# Altium PCB US_AB_PCB.PcbDoc
Units mm, origin at the board's own origin, x right, y up, seen from the top; angles counter-clockwise.
Board outline 100 x 100 mm, 2 copper layers (Top Layer, Bottom Layer), stack 0.98 mm thick; 25 components, 16 nets, 96 pads, 893 vias.
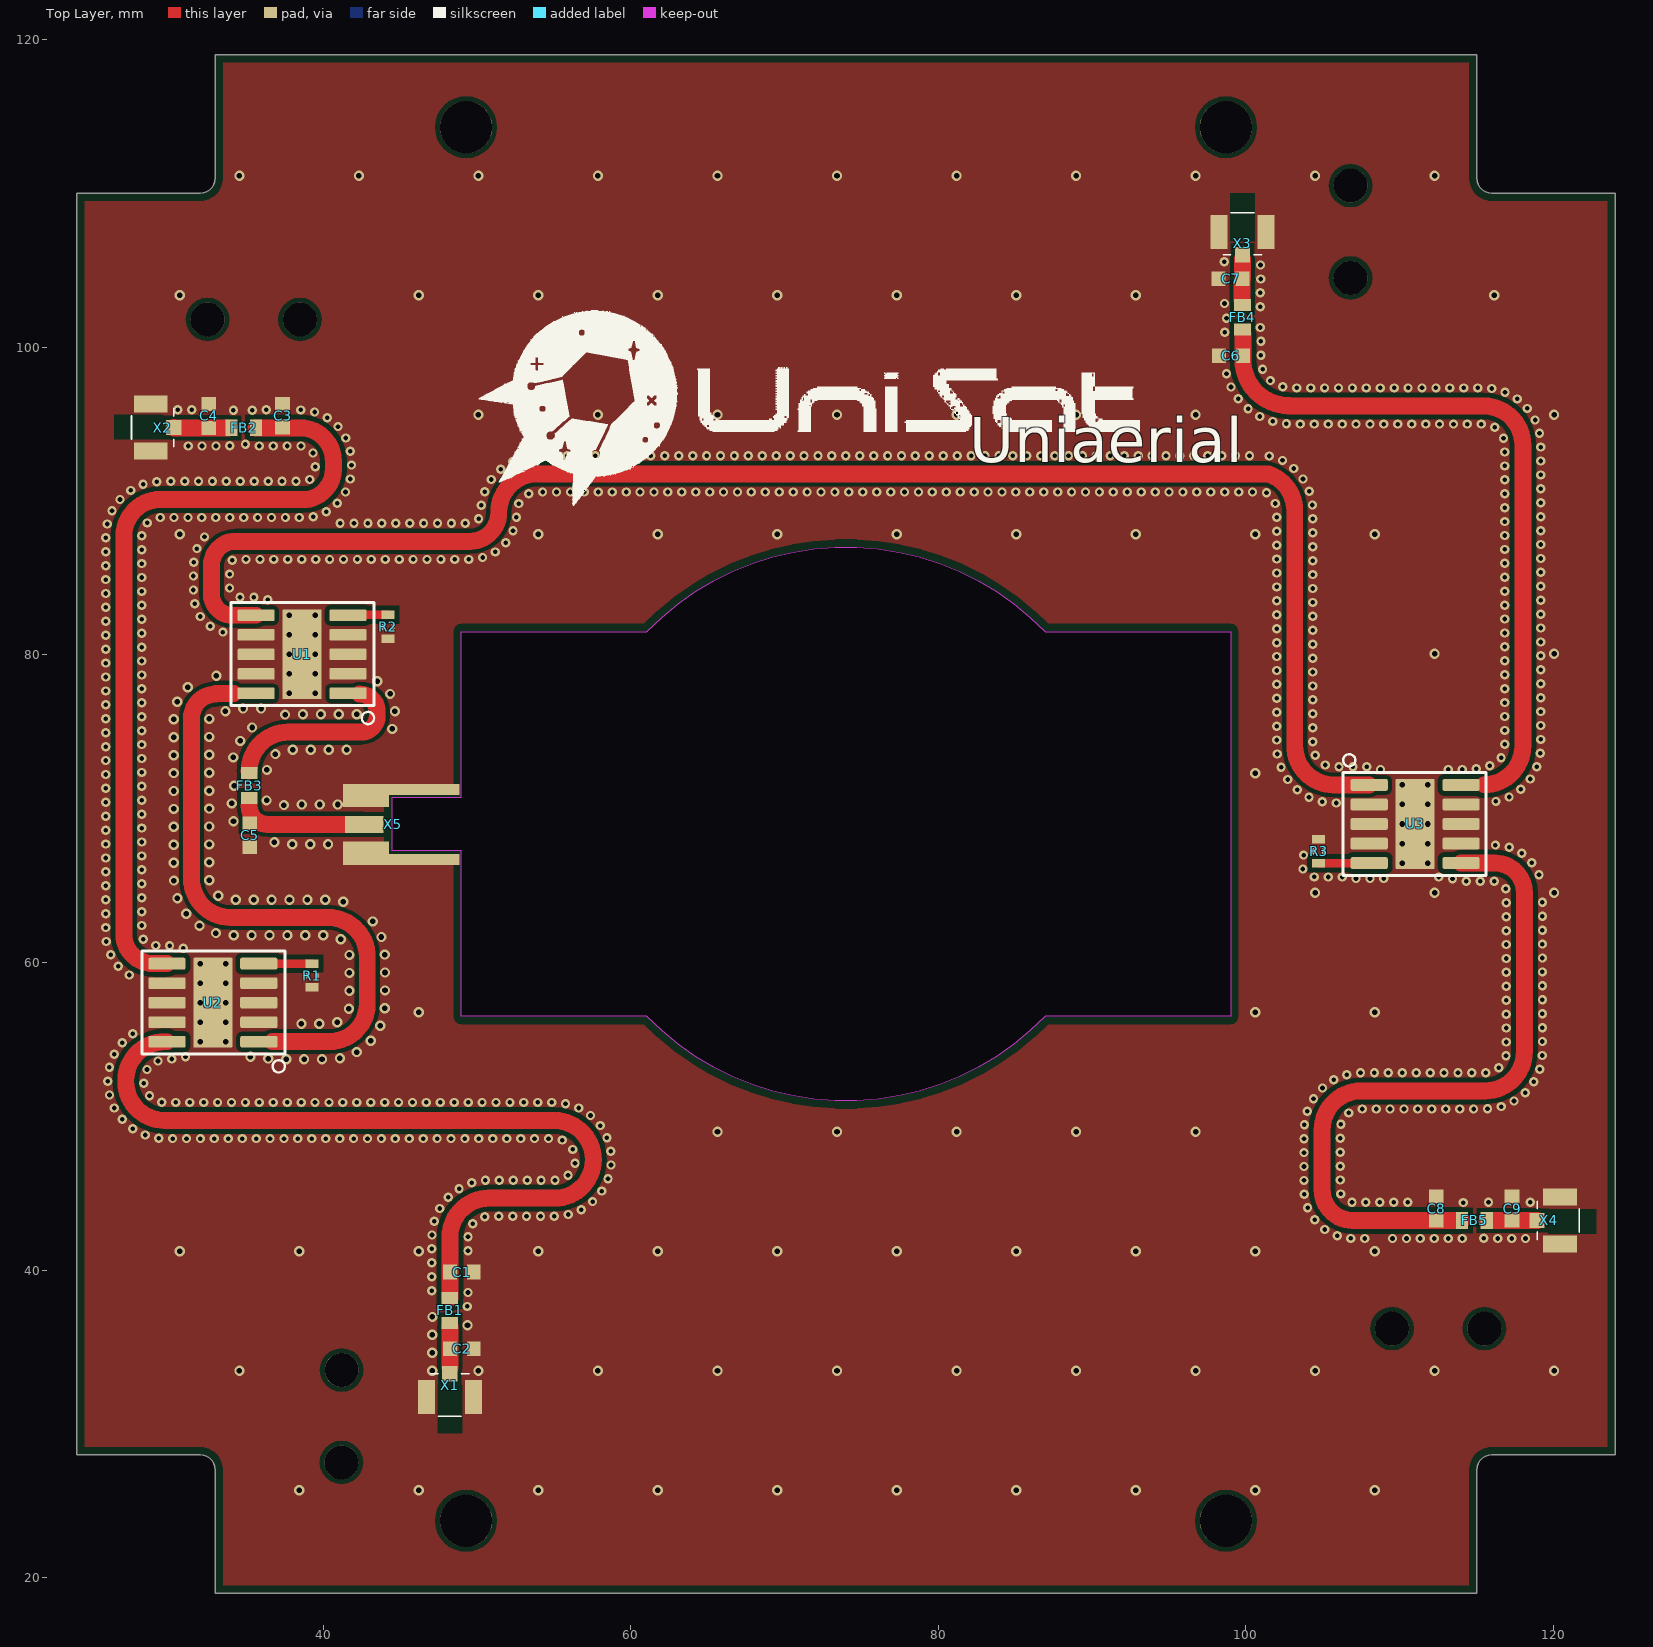
[diagram p0: Top Layer view]
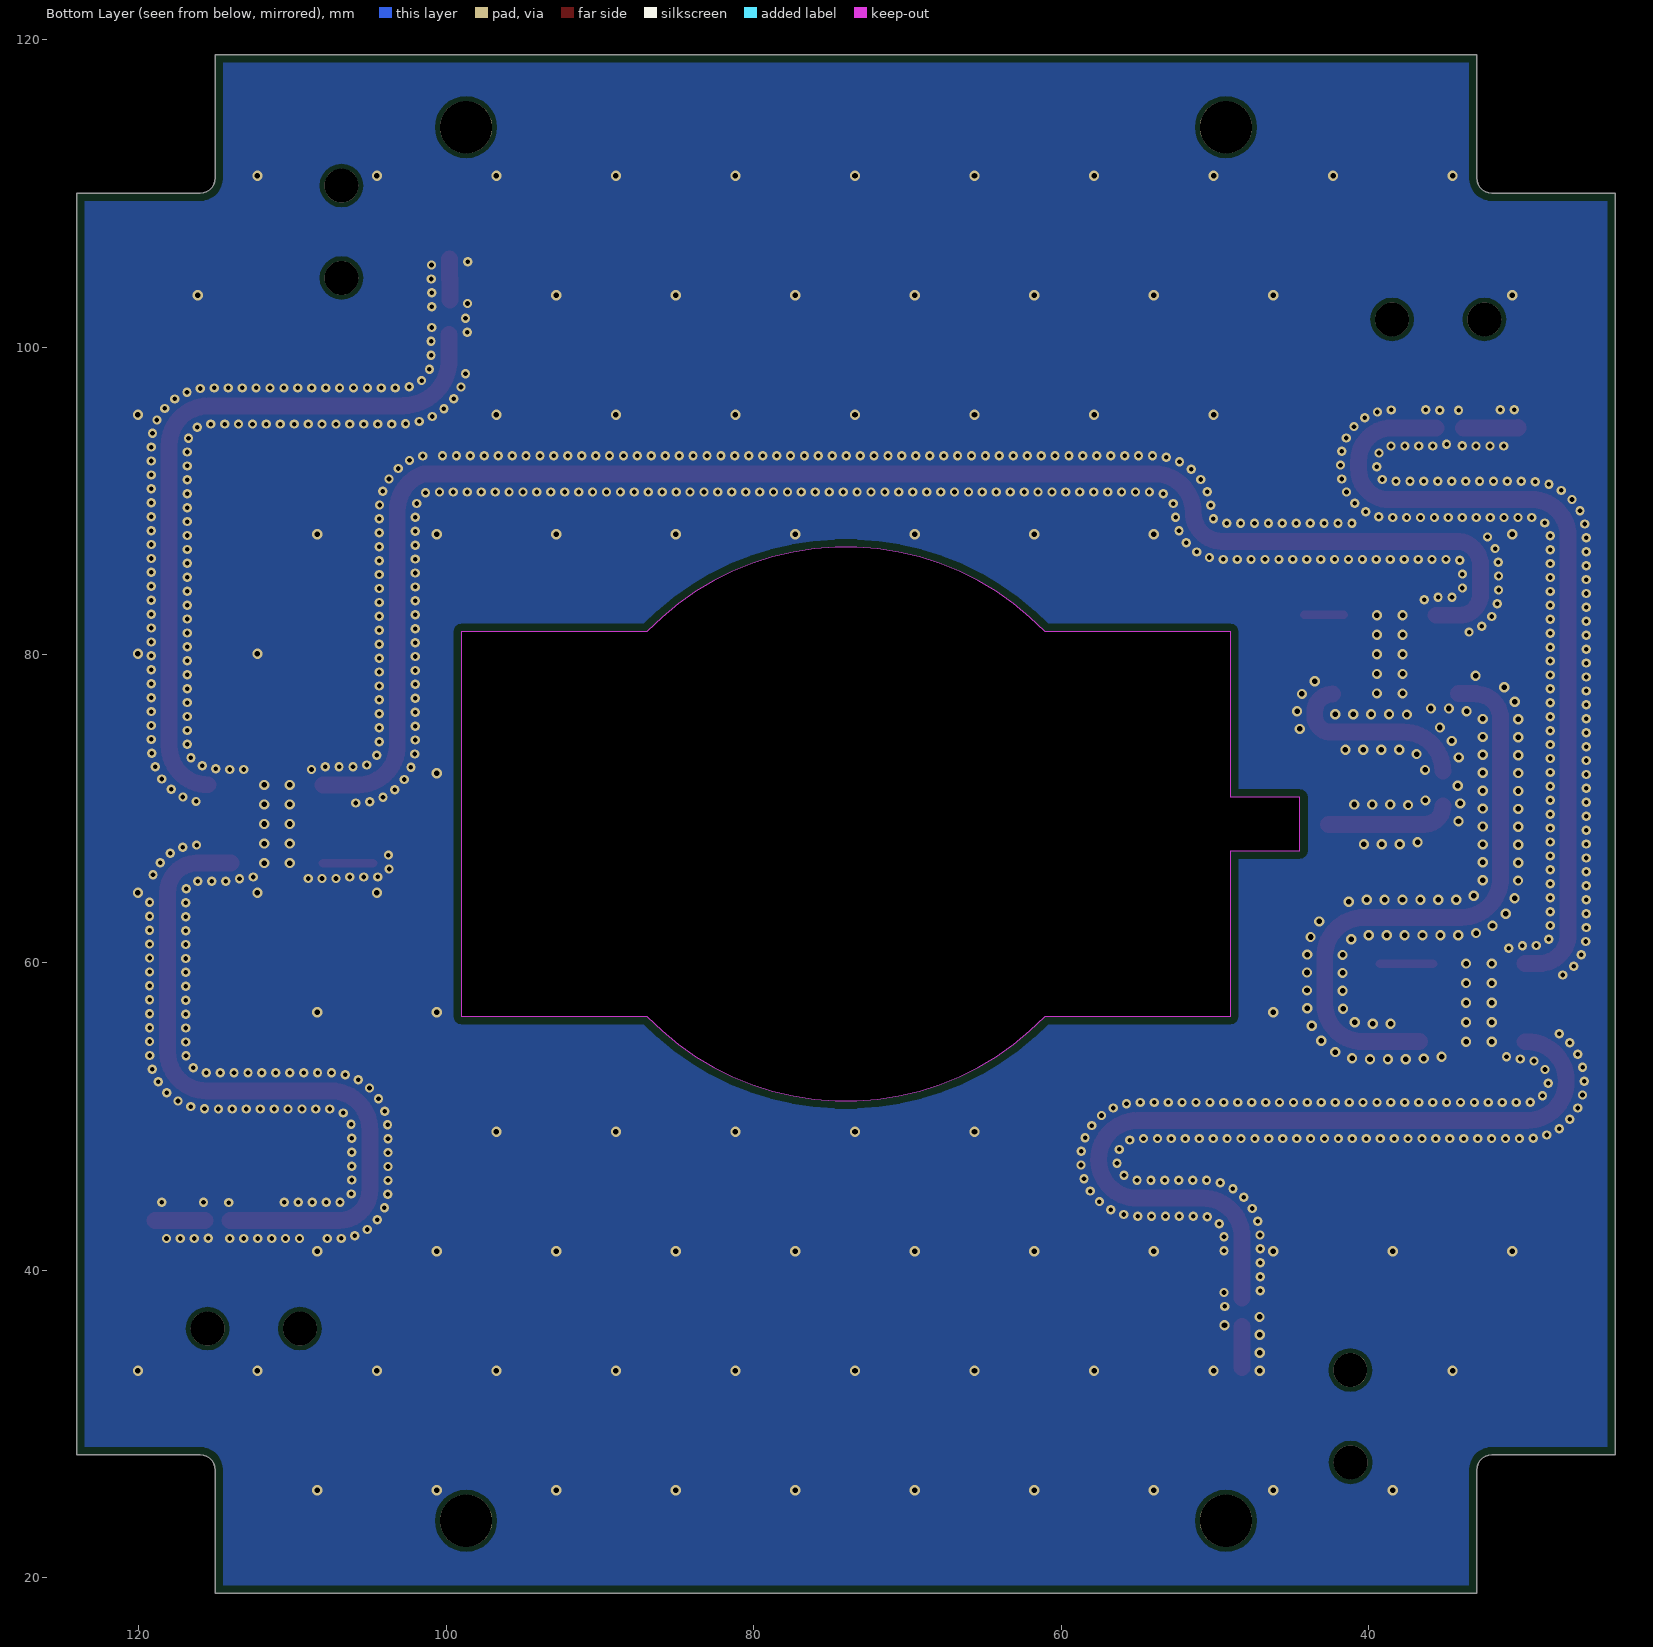
[diagram p1: Bottom Layer view, seen from below]
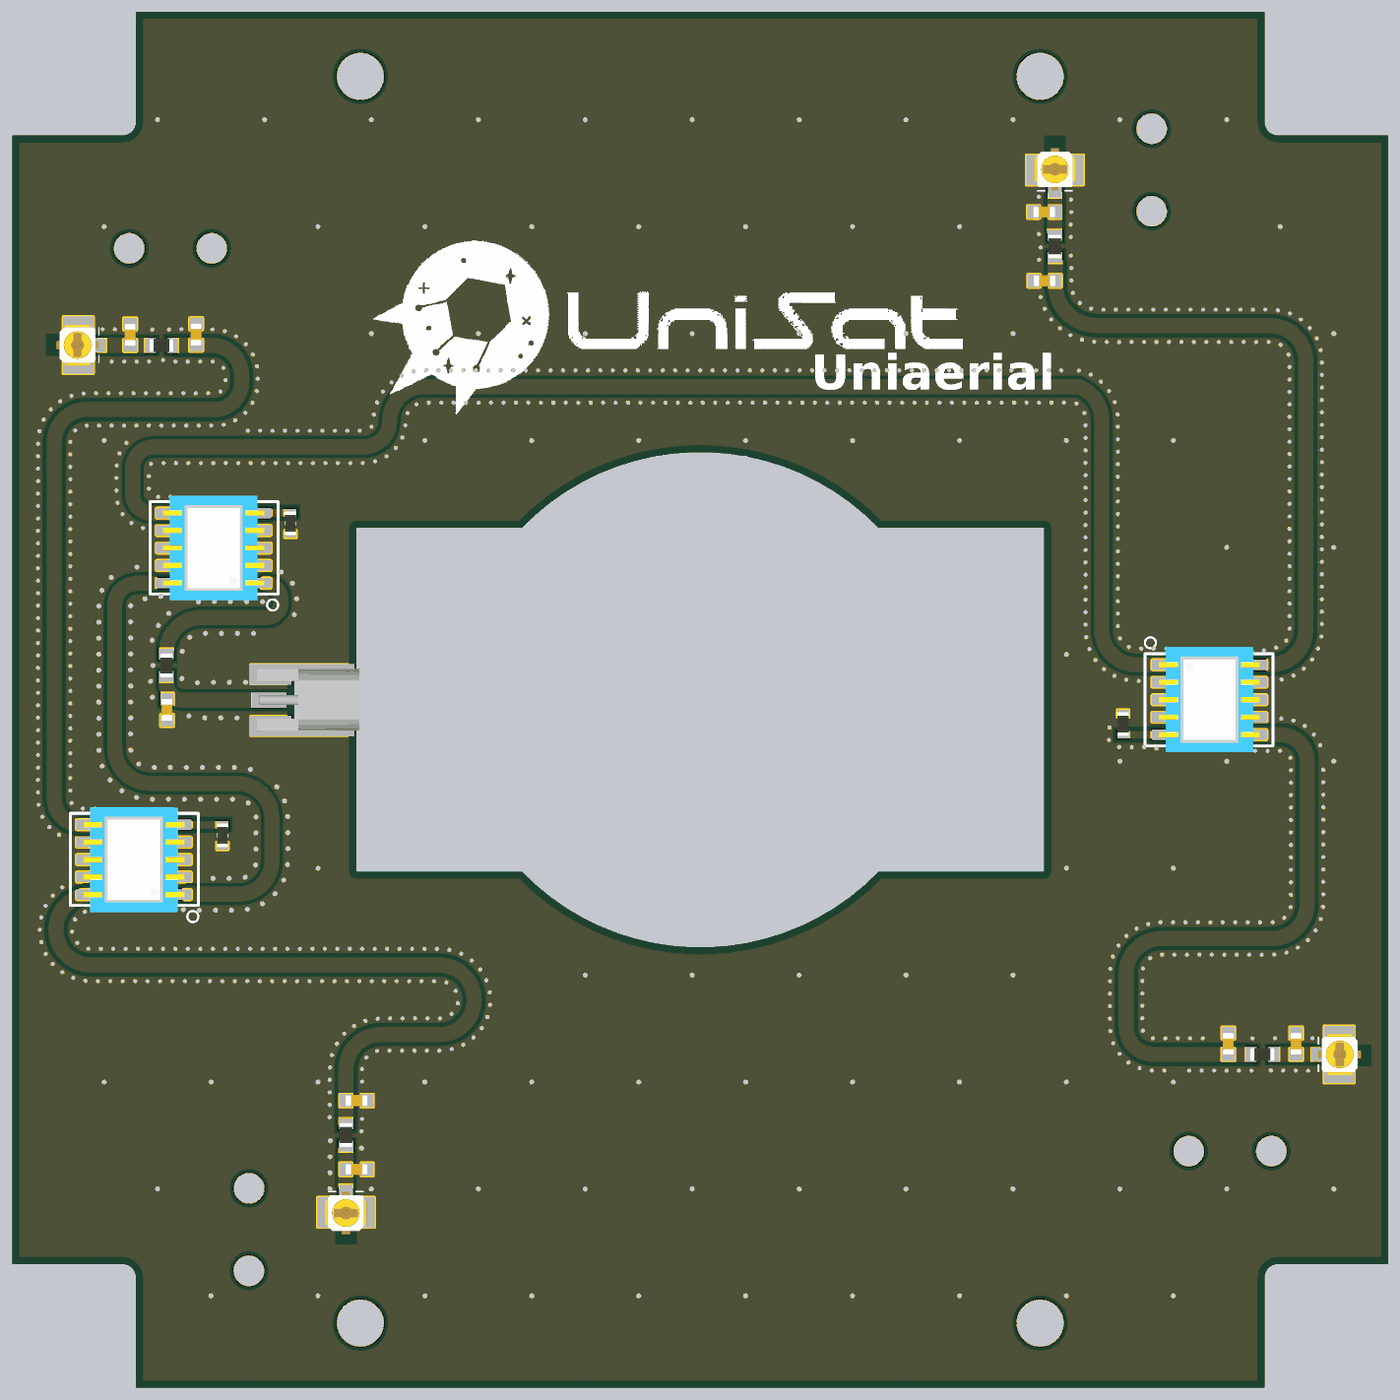
[diagram p2: 3D render of the assembled board from above, using the file's embedded part models]

## Layer stack, top to bottom
Top Solder: solder mask 0.01, Solder Resist, Dk 3.5
Top Layer: signal copper 0.035
Dielectric 1: dielectric 0.91, FR-4, Dk 4.8
Bottom Layer: signal copper 0.035
Bottom Solder: solder mask 0.01, Solder Resist, Dk 3.5

## Board outline
115,19 115,27 115.025,27.223 115.099,27.434 115.218,27.623 115.377,27.782 115.566,27.901 115.777,27.975 116,28 124,28 124,110 116,110 115.777,110.025 115.566,110.099 115.377,110.218 115.218,110.377 115.099,110.566 115.025,110.777 115,111 115,119 33,119 33,111 32.975,110.777 32.901,110.566 32.782,110.377 32.623,110.218 32.434,110.099 32.223,110.025 32,110 24,110 24,28 32,28 32.223,27.975 32.434,27.901 32.623,27.782 32.782,27.623 32.901,27.434 32.975,27.223 33,27 33,19
cut-out: 49,70.75 49,81.5 61.048,81.5 62.041,82.453 63.104,83.328 64.231,84.118 65.415,84.821 66.649,85.43 67.926,85.944 69.238,86.359 70.579,86.672 71.939,86.882 73.312,86.987 74.688,86.987 76.061,86.882 77.421,86.672 78.762,86.359 80.074,85.944 81.351,85.43 82.585,84.821 83.769,84.118 84.896,83.328 85.959,82.453 86.952,81.5 99,81.5 99,56.5 86.952,56.5 85.959,55.547 84.896,54.672 83.769,53.882 82.585,53.179 81.351,52.57 80.074,52.056 78.762,51.641 77.421,51.328 76.061,51.118 74.688,51.013 73.312,51.013 71.939,51.118 70.579,51.328 69.238,51.641 67.926,52.056 66.649,52.57 65.415,53.179 64.231,53.882 63.104,54.672 62.041,55.547 61.048,56.5 49,56.5 49,67.25 44.5,67.25 44.5,70.75

## Design rules (kind name [scope] priority, off if disabled: settings)
BoardOutlineClearance [All] p1: gap=0.5
BoardOutlineClearance BoardOutlineClearance_ALL [IsRegion and InNet('GND')] p2: gap=0.5
Clearance Clearance_RF [InNetClass('RF') vs InNet('GND')] p1: gap=0.25
Clearance Clearance_HOLE [IsRegion and OnMultiLayer] p2: gap=0.1
Clearance Clearance_ALL [All] p3: gap=0.3
ComponentClearance ComponentClearance_HOLE [IsBoardCutoutRegion] p1: gap=-1 collisioncheckmode=3 verticalgap=-1 showdistances=FALSE
ComponentClearance ComponentClearance_ALL [All] p2: gap=0.254 collisioncheckmode=3 verticalgap=0.254 showdistances=FALSE
HoleSize [All] p1: absolutevalues=TRUE maxlimit=6.2 minlimit=0.3 maxpercent=80.000 minpercent=20.000
MatchedLengths MatchedLengths_2 [InNetClass('RF_2')] p1: tolerance=1 checknetsindiffpair=FALSE checkdiffpairvsdiffpair=TRUE checkxsignals=TRUE checkothers=TRUE
MatchedLengths MatchedLengths_1 [InNetClass('RF_1')] p2: tolerance=1 checknetsindiffpair=FALSE checkdiffpairvsdiffpair=TRUE checkxsignals=TRUE checkothers=TRUE
MinimumAnnularRing [All] p1: minimumring=0.152
PolygonConnect PolygonConnect_GNDPAD [InNet('GND')] p1: connectstyle=Direct reliefconductorwidth=0.254 reliefentries=4 polygonreliefangle="90 Angle" airgapwidth=0.254
PolygonConnect PolygonConnect_ALL [All] p2: connectstyle=Relief reliefconductorwidth=0.254 reliefentries=4 polygonreliefangle="90 Angle" airgapwidth=0.254
RoutingVias [All] p1: holewidth=0.3 width=0.605 viastyle="Through Hole" minholewidth=0.2 minwidth=0.51 maxholewidth=1 maxwidth=2
SilkToSilkClearance [All] p1: silktosilkclearance=-1
SilkToSolderMaskClearance [All] p1: minsilkscreentomaskgap=-1 clearancetoexposedcopper=TRUE
SolderMaskExpansion [All] p1: expansion=0.102
Width Width_RF [InNetClass('RF')] p1: maxlimit=1.1 minlimit=1.1 preferedwidth=1.1
Width Width_ALL [All] p2: maxlimit=10 minlimit=0.157 preferedwidth=0.3
26 further rules are at their usual default settings.

## Classes and differential pairs
net class RF: NetC2_2 NetC4_2 NetC5_2 NetC7_2 NetC9_2 NetFB3_2 NetU1_6 NetU1_10
net class RF_1: NetC1_2 NetC3_2
net class RF_2: NetC6_2 NetC8_2

## Components (designator, comment, footprint, x,y, rotation, side; value= is the part's Value field where it differs from the comment)
C1 "100n" C0603_IPC_MD 49.025,39.875 r180 top
C2 "100n" C0603_IPC_MD 49.025,34.875 r180 top
C3 "100n" C0603_IPC_MD 37.367,95.544 r270 top
C4 "100n" C0603_IPC_MD 32.575,95.525 r270 top
C5 "100n" C0603_IPC_MD 35.25,68.275 r90 top
C6 "100n" C0603_IPC_MD 99.025,99.445 r0 top
C7 "100n" C0603_IPC_MD 99,104.445 r0 top
C8 "100n" C0603_IPC_MD 112.375,44 r270 top
C9 "100n" C0603_IPC_MD 117.3,44 r270 top
FB1 "MH1608-601Y" L0603_IPC_LD 48.25,37.375 r270 top
FB2 "MH1608-601Y" L0603_IPC_LD 34.85,94.75 r180 top
FB3 "MH1608-601Y" L0603_IPC_LD 35.2,71.5 r90 top
FB4 "MH1608-601Y" L0603_IPC_LD 99.775,101.945 r90 top
FB5 "MH1608-601Y" L0603_IPC_LD 114.85,43.225 r0 top
R1 "50R" R0603_IPC_MD 39.275,59.15 r90 top
R2 "50R" R0603_IPC_MD 44.225,81.825 r90 top
R3 "50R" R0603_IPC_MD 104.725,67.225 r270 top
U1 "QBA-07+" QBA-07+ 38.64,80.03 r90 top
U2 "QBA-07+" QBA-07+ 32.84,57.385 r90 top
U3 "QBA-07+" QBA-07+ 111,69 r270 top
X1 "U.FL" U.FL 48.25,31.75 r180 top
X2 "U.FL" U.FL 28.8,94.775 r90 top
X3 "U.FL" U.FL 99.775,107.495 r0 top
X4 "U.FL" U.FL 120.425,43.225 r270 top
X5 "MMCX" MMCX_EDGE 49.125,68.975 r180 top locked

## Footprints (in the part's own frame and the unit in brackets; to place one, negate y for a bottom-side part, rotate by r counter-clockwise, add the part's x,y. Pads: shape width x height; smd on the part's side, far side on the other; paste and mask are expansions set on the pad)
C0603_IPC_MD [mm] "Chip Capacitor, 2-Leads, Body 1,60x0,80mm, IPC Medium Density"
  rect 0.9x0.95 smd: 1(-0.775,0) 2(0.775,0)
  body extent -0.8,-0.4 0.8,0.4, height 0.8
L0603_IPC_LD [mm]
  rect 0.79x1.08 smd: 1(-0.805,0) 2(0.805,0)
  body extent -0.87,-0.48 0.87,0.48, height 0.8
MMCX_EDGE [mm]
  rect 5x0.7 smd mask+0.051: 1(2.75,2.275) 1(2.75,-2.275)
  rect 3x1.5 smd mask+0.051: 1(6.325,-1.875) 1(6.325,1.875)
  rect 2.5x1.1 smd mask+0.051: 2(6.45,0)
  body extent -0.09,-2.27 7.35,2.23, height 2.1
QBA-07+ [mm]
  rrect25% 0.76x2.41 smd: 1(-2.54,-2.985) 2(-1.27,-2.985) 3(0,-2.985) 4(1.27,-2.985) 5(2.54,-2.985) 6(2.54,2.985) 7(1.27,2.985) 8(0,2.985) 9(-1.27,2.985) 10(-2.54,2.985)
  rrect5% 5.84x2.54 smd: 11(0,0)
  silkscreen extent -4.54,-4.69 3.36,4.61, body extent -3.81,-3.67 3.81,3.67, height 1.1
R0603_IPC_MD [mm] "Chip Resistor, 2-Leads, Body 1,60x0,80mm, IPC Medium Density"
  rect 0.55x0.85 smd: 1(-0.775,0) 2(0.775,0)
  silkscreen extent -0.1,-0.33 0.1,0.33, body extent -0.85,-0.4 0.85,0.4, height 0.45
U.FL [mm] "RF CONNECTOR"
  rect 1.1x2.2 smd: 1(-1.525,0) 1(1.525,0)
  rect 1x1 smd: 2(0,-1.5)
  silkscreen extent -1.25,-1.5 1.25,1.25, body extent -1.5,-1.5 1.5,1.6, height 1.25

## Part data
C1 C2 C3 C4 C5 C6 C7 C8 C9: library part CL10B104KO8NNNC
FB1 FB2 FB3 FB4 FB5: "FERRITE BEAD 600R@100MHz 0603 for Power Line, 1000mA"
R1 R2 R3: library part CR0603-J/-000ELF, "RES SMD 0 OHM JUMPER 1/10W 0603"
U1 U2 U3: "Power Splitter/Combiner 2 Way-90° 50? 340 to 680 MHz"
X1 X2 X3 X4: "SMA slot"
X5: "MMCX PCB EDGE CONN"

## Free pads (board coordinates)
  round 2.2 hole 2.2: 1(32.5,101.8) 1(38.5,101.8) 1(41.2,27.5) 1(41.214,33.5) 1(106.8,104.5) 1(106.8,110.5) 1(109.5,36.2) 1(115.5,36.2)
  round 3.4 hole 3.4: 1(49.3,23.7) 1(49.3,114.3) 1(98.7,23.7) 1(98.7,114.3)

## Via types
v1: diameter 0.605, hole 0.3, Top Layer to Bottom Layer, tented both sides, 678 vias
v2: diameter 0.665, hole 0.36, Top Layer to Bottom Layer, tented both sides, 185 vias
v3: diameter 0.665, hole 0.36, Top Layer to Bottom Layer, 30 vias

## Nets (pads, with @x,y where several pads share a name; then routed paths per layer and width w, separated by ;. In a path a pad name is that pad's centre, name@x,y a point inside that pad or via, vN(x,y) a via of type N, cw(c..) or ccw(c..) an arc to the next point about the centre after c; other vN are vias at no path point)
GND: C1.1 C2.1 C3.1 C4.1 C5.1 C6.1 C7.1 C8.1 C9.1 R1.1 R2.1 R3.1 U1.2 U1.3 U1.4 U1.7 U1.8 U1.9 U1.11 U2.2 U2.3 U2.4 U2.7 U2.8 U2.9 U2.11 U3.2 U3.3 U3.4 U3.7 U3.8 U3.9 U3.11 X1.1 X2.1 X3.1 X4.1 X5.1
  other v1: 49.375,37.637 49.425,38.54 47.075,38.663 47.075,39.568 47.075,40.473 49.425,41.255 47.075,41.378 106.816,42.059 107.721,42.05 109.531,42.05 110.436,42.05 111.341,42.05 112.246,42.05 113.151,42.05 114.056,42.052 116.367,42.05 117.272,42.05 118.177,42.05 115.463,42.071 49.423,42.16 105.927,42.229 47.086,42.283 105.118,42.635 49.742,43.007 47.23,43.176 104.467,43.264 50.516,43.476 51.421,43.5 52.326,43.5 53.231,43.5 54.136,43.5 55.041,43.5 55.938,43.616 56.787,43.931 47.592,44.006 104.007,44.043 114.133,44.388 106.894,44.402 107.799,44.4 108.704,44.4 109.609,44.4 110.514,44.4 115.768,44.4 118.483,44.4 57.525,44.454 48.136,44.729 103.8,44.924 106.173,44.95 58.119,45.137 48.847,45.289 49.667,45.67 50.558,45.832 103.775,45.829 51.463,45.85 52.368,45.85 53.273,45.85 54.178,45.85 55.083,45.847 106.125,45.854 58.528,45.944 55.928,46.169 103.775,46.734 106.125,46.759 58.723,46.828 56.382,46.953 103.775,47.639 106.125,47.664 58.705,47.733 56.228,47.844 55.557,48.451 30.222,48.55 31.127,48.55 32.032,48.55 32.937,48.55 33.842,48.55 34.747,48.55 35.652,48.55 36.557,48.55 37.462,48.55 38.367,48.55 39.272,48.55 40.177,48.55 41.082,48.55 41.987,48.55 42.892,48.55 43.797,48.55 44.702,48.55 45.607,48.55 46.512,48.55 47.417,48.55 48.322,48.55 49.227,48.55 50.132,48.55 51.037,48.55 51.942,48.55 52.847,48.55 53.752,48.55 54.657,48.55 103.775,48.544 29.317,48.581 106.125,48.569 58.457,48.603 28.436,48.785 27.63,49.198 58.016,49.394 103.801,49.449 106.176,49.473 26.952,49.797 57.389,50.046 106.69,50.217 103.988,50.334 107.558,50.475 108.463,50.475 109.368,50.475 110.273,50.475 111.178,50.475 112.083,50.475 112.988,50.475 113.893,50.475 114.798,50.475 115.703,50.485 26.43,50.536 56.627,50.535 116.596,50.629 55.768,50.819 29.527,50.914 30.432,50.9 31.337,50.9 32.242,50.9 33.147,50.9 34.052,50.9 34.957,50.9 35.862,50.9 36.767,50.9 37.672,50.9 38.577,50.9 39.482,50.9 40.387,50.9 41.292,50.9 42.197,50.9 43.102,50.9 44.007,50.9 44.912,50.9 45.817,50.9 46.722,50.9 47.627,50.9 48.532,50.9 49.437,50.9 50.342,50.9 51.247,50.9 52.152,50.9 53.057,50.9 53.962,50.9 54.867,50.9 117.427,50.989 104.392,51.144 28.722,51.327 26.117,51.385 118.151,51.532 104.976,51.835 28.356,52.155 118.711,52.243 26,52.283 105.71,52.364 106.553,52.695 107.449,52.821 108.354,52.825 109.259,52.825 110.164,52.825 111.069,52.825 111.974,52.825 112.879,52.825 113.784,52.825 114.689,52.825 115.594,52.824 28.561,53.037 119.093,53.063 116.439,53.148 26.116,53.18 29.273,53.595 30.169,53.72 31.063,53.862 116.903,53.925 119.257,53.953 26.428,54.029 26.949,54.77 116.925,54.829 119.275,54.858 27.626,55.37 116.925,55.734 119.275,55.763 116.925,56.639 119.275,56.668 116.925,57.544 119.275,57.573 116.925,58.449 119.275,58.478 27.405,59.184 116.925,59.354 119.275,59.383 26.699,59.75 116.925,60.259 119.275,60.288 26.192,60.499 30.919,60.927 30.027,61.078 29.122,61.1 116.925,61.164 119.275,61.193 25.918,61.362 28.309,61.498 116.925,62.069 119.275,62.098 25.875,62.266 28.225,62.399 116.925,62.974 119.275,63.003 25.875,63.171 28.225,63.304 116.925,63.879 119.275,63.908 25.875,64.076 28.225,64.209 116.887,64.784 25.875,64.981 28.225,65.114 114.323,65.285 115.228,65.285 116.133,65.285 113.43,65.431 107.158,65.458 108.063,65.458 108.968,65.458 104.449,65.561 105.354,65.555 106.259,65.555 112.534,65.557 119.051,65.695 25.875,65.886 28.225,66.019 103.705,66.077 118.589,66.473 25.875,66.791 28.225,66.924 103.746,66.981 117.929,67.093 117.113,67.483 116.22,67.63 25.875,67.696 28.225,67.829 25.875,68.601 28.225,68.734 25.875,69.506 28.225,69.639 105.862,70.365 25.875,70.411 104.961,70.451 116.251,70.467 28.225,70.544 104.103,70.738 117.108,70.758 103.345,71.233 117.86,71.26 25.875,71.316 28.225,71.449 102.723,71.89 118.477,71.923 25.875,72.221 28.225,72.354 108.748,72.542 113.156,72.542 114.061,72.542 114.965,72.598 102.285,72.682 106.049,72.715 106.954,72.715 107.859,72.715 118.907,72.719 115.851,72.78 105.152,72.835 25.875,73.126 28.225,73.259 116.588,73.306 104.5,73.462 102.041,73.554 119.138,73.594 25.875,74.031 28.225,74.164 116.825,74.179 104.35,74.355 102,74.458 119.175,74.498 25.875,74.936 28.225,75.069 116.825,75.084 104.35,75.26 102,75.363 119.175,75.403 25.875,75.841 28.225,75.974 116.825,75.989 104.35,76.165 102,76.268 119.175,76.308 25.875,76.746 28.225,76.879 116.825,76.894 104.35,77.07 102,77.173 119.175,77.213 25.875,77.651 28.225,77.784 116.825,77.799 104.35,77.975 102,78.078 119.175,78.118 25.875,78.556 28.225,78.689 116.825,78.704 104.35,78.88 102,78.983 119.175,79.023 25.875,79.461 28.225,79.594 116.825,79.609 104.35,79.785 102,79.888 119.175,79.928 25.875,80.366 28.225,80.499 116.825,80.514 104.35,80.69 102,80.793 119.175,80.833 25.875,81.271 28.225,81.404 116.825,81.419 33.495,81.477 104.35,81.595 102,81.698 119.175,81.738 32.67,81.849 25.875,82.176 28.225,82.309 116.825,82.324 32.029,82.489 104.35,82.5 102,82.603 119.175,82.643 25.875,83.081 28.225,83.214 116.825,83.229 31.658,83.314 104.35,83.405 102,83.508 119.175,83.548 36.398,83.572 34.605,83.745 35.51,83.745 25.875,83.986 28.225,84.119 116.825,84.134 31.575,84.215 104.35,84.31 33.925,84.343 102,84.413 119.175,84.453 25.875,84.891 28.225,85.024 116.825,85.039 31.575,85.12 104.35,85.215 33.925,85.248 102,85.318 119.175,85.358 25.875,85.796 28.225,85.929 116.825,85.944 31.592,86.025 104.35,86.12 34.094,86.137 34.996,86.2 35.901,86.2 36.806,86.2 37.711,86.2 38.616,86.2 39.521,86.2 40.426,86.2 41.331,86.2 42.236,86.2 43.141,86.2 44.046,86.2 44.951,86.2 45.856,86.2 46.761,86.2 47.666,86.2 48.571,86.2 49.476,86.2 102,86.223 119.175,86.263 50.373,86.324 25.875,86.701 51.201,86.689 28.225,86.834 116.825,86.849 31.804,86.905 104.35,87.025 102,87.128 119.175,87.168 51.875,87.292 25.875,87.606 32.297,87.663 28.224,87.739 116.825,87.754 104.35,87.93 102,88.033 52.353,88.061 119.175,88.073 25.976,88.505 41.109,88.55 42.014,88.55 42.919,88.55 43.824,88.55 44.729,88.55 45.634,88.55 46.539,88.55 47.444,88.55 48.349,88.55 49.254,88.55 28.578,88.572 116.825,88.659 50.113,88.837 104.35,88.835 29.411,88.926 30.316,88.925 31.221,88.925 32.126,88.925 33.031,88.925 33.936,88.925 34.841,88.925 35.746,88.925 36.651,88.925 37.556,88.925 38.461,88.925 52.573,88.939 102,88.938 39.364,88.98 119.175,88.978 40.208,89.308 26.284,89.356 116.825,89.564 50.287,89.725 104.321,89.739 52.733,89.829 40.932,89.851 101.914,89.839 119.175,89.883 26.804,90.097 53.378,90.465 116.825,90.469 101.333,90.532 41.465,90.582 54.275,90.586 55.18,90.586 56.085,90.586 56.99,90.586 57.895,90.586 58.8,90.586 59.705,90.586 60.61,90.586 61.515,90.586 62.42,90.586 63.325,90.586 64.23,90.586 65.135,90.586 66.04,90.586 66.945,90.586 67.85,90.586 68.755,90.586 69.66,90.586 70.565,90.586 71.47,90.586 72.375,90.586 73.28,90.586 74.185,90.586 75.09,90.586 75.995,90.586 76.9,90.586 77.805,90.586 78.71,90.586 79.615,90.586 80.52,90.586 81.425,90.586 82.33,90.586 83.235,90.586 84.14,90.586 85.045,90.586 85.95,90.586 86.855,90.586 87.76,90.586 88.665,90.586 89.57,90.586 90.475,90.586 91.38,90.586 92.285,90.586 93.19,90.586 94.095,90.586 95,90.586 95.905,90.586 96.81,90.586 97.715,90.586 98.62,90.586 99.525,90.586 100.43,90.586 50.517,90.6 104.122,90.622 27.492,90.685 119.175,90.788 28.304,91.084 29.193,91.256 30.097,91.275 31.002,91.275 31.907,91.275 32.812,91.275 33.717,91.275 34.622,91.275 35.527,91.275 36.432,91.275 37.337,91.275 38.242,91.275 116.825,91.374 39.139,91.395 50.947,91.396 41.779,91.431 103.712,91.429 119.175,91.693 51.564,92.058 103.117,92.111 39.5,92.225 116.825,92.279 41.85,92.333 52.318,92.558 119.175,92.598 102.379,92.636 53.176,92.848 101.522,92.925 54.077,92.936 54.982,92.936 55.887,92.936 56.792,92.936 57.697,92.936 58.602,92.936 59.507,92.936 60.412,92.936 61.317,92.936 62.222,92.936 63.127,92.936 64.032,92.936 64.937,92.936 65.842,92.936 66.747,92.936 67.652,92.936 68.557,92.936 69.462,92.936 70.367,92.936 71.272,92.936 72.177,92.936 73.082,92.936 73.987,92.936 74.892,92.936 75.797,92.936 76.702,92.936 77.607,92.936 78.512,92.936 79.417,92.936 80.322,92.936 81.227,92.936 82.132,92.936 83.037,92.936 83.942,92.936 84.847,92.936 85.752,92.936 86.657,92.936 87.562,92.936 88.467,92.936 89.372,92.936 90.277,92.936 91.182,92.936 92.087,92.936 92.992,92.936 93.897,92.936 94.802,92.936 95.707,92.936 96.612,92.936 97.517,92.936 98.422,92.936 99.327,92.936 100.232,92.936 39.351,93.118 116.825,93.184 41.781,93.235 119.175,93.503 31.232,93.575 32.137,93.575 33.042,93.575 33.947,93.587 35.854,93.575 36.759,93.575 37.664,93.575 38.569,93.573 34.956,93.688 41.488,94.092 116.747,94.086 119.085,94.404 116.183,94.794 40.974,94.836 102.632,95.017 103.537,95 104.442,95 105.347,95 106.252,95 107.157,95 108.062,95 108.967,95 109.872,95 110.777,95 111.682,95 112.587,95 113.492,95 114.397,95 115.302,95 101.741,95.172 118.796,95.261 40.277,95.414 100.893,95.49 39.452,95.786 34.177,95.904 35.397,95.904 30.557,95.925 31.462,95.925 36.302,95.925 38.557,95.919 100.139,95.99 118.297,96.017 99.506,96.637 117.637,96.635 116.844,97.071 115.971,97.311 103.302,97.35 104.207,97.35 105.112,97.35 106.017,97.35 106.922,97.35 107.827,97.35 108.732,97.35 109.637,97.35 110.542,97.35 111.447,97.35 112.352,97.35 113.257,97.35 114.162,97.35 115.067,97.35 99.031,97.407 102.399,97.416 101.593,97.826 98.739,98.264 101.081,98.573 100.975,99.472 100.975,100.377 98.621,100.972 100.929,101.281 98.734,101.87 100.929,102.624 98.605,102.839 100.925,103.529 100.969,104.433 100.95,105.338 98.6,105.553
  other v2: 38.45,25.68 46.22,25.68 53.99,25.68 61.76,25.68 69.53,25.68 77.3,25.68 85.07,25.68 92.84,25.68 100.61,25.68 108.38,25.68 34.565,33.45 47.095,33.462 50.105,33.45 57.875,33.45 65.645,33.45 73.415,33.45 81.185,33.45 88.955,33.45 96.725,33.45 104.495,33.45 112.265,33.45 120.035,33.45 47.095,34.627 47.095,35.792 49.393,36.411 47.116,36.957 30.68,41.22 38.45,41.22 46.22,41.22 53.99,41.22 61.76,41.22 69.53,41.22 77.3,41.22 85.07,41.22 92.84,41.22 100.61,41.22 108.38,41.22 65.645,48.99 73.415,48.99 81.185,48.99 88.955,48.99 96.725,48.99 37.605,53.705 38.77,53.705 39.935,53.705 36.441,53.747 41.098,53.773 35.281,53.863 42.192,54.173 43.101,54.903 43.728,55.884 38.597,56.015 39.762,56.015 40.923,56.107 46.22,56.76 100.61,56.76 108.38,56.76 41.682,56.991 44.008,57.015 41.72,58.155 44.03,58.18 41.72,59.32 44.03,59.345 41.715,60.485 44.02,60.51 41.151,61.505 43.797,61.653 34.192,61.77 35.357,61.77 36.522,61.77 37.687,61.77 38.852,61.77 40.017,61.77 33.035,61.906 31.972,62.381 43.228,62.67 31.11,63.165 41.309,63.94 34.328,64.08 35.493,64.08 36.658,64.08 37.823,64.08 38.988,64.08 40.153,64.08 30.535,64.179 33.19,64.332 104.495,64.53 112.265,64.53 120.035,64.53 30.306,65.321 32.612,65.343 30.295,66.486 32.605,66.508 30.295,67.651 32.605,67.673 38.001,67.681 39.166,67.681 40.331,67.681 36.844,67.82 30.295,68.816 32.605,68.838 34.181,69.178 30.295,69.981 32.605,70.003 37.459,70.231 38.623,70.269 39.788,70.269 40.953,70.269 34.066,70.337 36.334,70.533 30.295,71.146 32.605,71.168 34.227,71.491 30.295,72.311 100.61,72.3 32.605,72.333 36.358,72.516 34.166,73.327 30.295,73.476 32.605,73.498 36.909,73.543 38.04,73.82 39.205,73.82 40.37,73.82 41.535,73.82 34.623,74.398 30.295,74.641 32.605,74.663 44.501,75.184 35.391,75.274 30.295,75.806 32.605,75.828 37.533,76.114 38.698,76.13 39.863,76.13 41.028,76.13 42.193,76.13 33.653,76.335 44.673,76.336 34.805,76.508 35.97,76.508 30.521,76.949 44.357,77.457 31.201,77.895 43.534,78.282 33.069,78.645 112.265,80.07 120.035,80.07 30.68,87.84 53.99,87.84 61.76,87.84 69.53,87.84 77.3,87.84 85.07,87.84 92.84,87.84 100.61,87.84 108.38,87.84 50.105,95.61 57.875,95.61 65.645,95.61 73.415,95.61 81.185,95.61 88.955,95.61 96.725,95.61 120.035,95.61 30.68,103.38 46.22,103.38 53.99,103.38 61.76,103.38 69.53,103.38 77.3,103.38 85.07,103.38 92.84,103.38 116.15,103.38 34.565,111.15 42.335,111.15 50.105,111.15 57.875,111.15 65.645,111.15 73.415,111.15 81.185,111.15 88.955,111.15 96.725,111.15 104.495,111.15 112.265,111.15
  other v3: 32.015,54.845 33.685,54.845 32.015,56.115 33.685,56.115 32.015,57.385 33.685,57.385 32.015,58.655 33.685,58.655 32.015,59.925 33.685,59.925 110.155,66.46 111.825,66.46 110.155,67.73 111.825,67.73 110.155,69 111.825,69 110.155,70.27 111.825,70.27 110.155,71.54 111.825,71.54 37.815,77.49 39.485,77.49 37.815,78.76 39.485,78.76 37.815,80.03 39.485,80.03 37.815,81.3 39.485,81.3 37.815,82.57 39.485,82.57
NetC1_2: C1.2 FB1.1 U2.10 | length 53.6
  Top Layer w1.1: U2.10 29.715,54.845 ccw(c29.715,52.305) 27.175,52.305 27.175,52.265 ccw(c29.715,52.265) 29.715,49.725 55.035,49.725 cw(c55.035,47.185) 57.575,47.185 cw(c55.065,47.185) 55.065,44.675 50.79,44.675 ccw(c50.79,42.135) 48.25,42.135 FB1.1
NetC2_2: C2.2 FB1.2 X1.2 | length 2.7
  Top Layer w1.1: X1.2@48.25,33.65 C2.2 FB1.2@48.25,36.35
NetC3_2: C3.2 FB2.1 U2.6 | length 52.7
  Top Layer w1.1: U2.6 28.969,59.925 cw(c28.969,61.844) 27.05,61.844 27.05,87.71 cw(c29.44,87.71) 29.44,90.1 38.682,90.1 ; FB2.1 38.525,94.75 cw(c38.525,92.6) 40.675,92.6 40.675,92.073 cw(c38.682,92.073) 38.682,90.08
NetC4_2: C4.2 FB2.2 X2.2 | length 3.6
  Top Layer w1.1: X2.2 ccw(c30.325,94.775) 30.325,94.75 FB2.2@33.875,94.75
NetC5_2: C5.2 FB3.1 X5.2 | length 8.1
  Top Layer w1.1: 35.2,70.175 ccw(c36.4,70.175) 36.4,68.975 X5.2@42.65,68.975
NetC6_2: C6.2 FB4.1 U3.10 | length 46.5
  Top Layer w1.1: FB4.1@99.8,100.825 C6.2 99.8,99.184 ccw(c102.78,99.184) 102.78,96.205 ; 102.78,96.175 115.46,96.175 cw(c115.46,93.635) 118,93.635 118,74.075 cw(c115.475,74.075) 115.475,71.55
NetC7_2: C7.2 FB4.2 X3.2 | length 2.7
  Top Layer w1.1: FB4.2@99.75,103.05 99.75,104.42 cw(c99.775,104.42) C7.2 X3.2@99.775,105.725
NetC8_2: C8.2 FB5.1 U3.6 | length 45.7
  Top Layer w1.1: U3.6 116.19,66.46 cw(c116.19,64.55) 118.1,64.55 118.1,54.19 cw(c115.56,54.19) 115.56,51.65 107.49,51.65 ccw(c107.49,49.11) 104.95,49.11 104.95,45.226 ccw(c106.951,45.226) 106.951,43.225 C8.2 FB5.1
NetC9_2: C9.2 FB5.2 X4.2 | length 3.3
  Top Layer w1.1: FB5.2 C9.2 X4.2
NetFB3_2: FB3.2 U1.1 | length 12.5
  Top Layer w1.1: FB3.2@35.2,72.435 cw(c37.74,72.435) 37.74,74.975 42.475,74.975 ccw(c42.475,76.025) 43.525,76.025 43.525,76.3 ccw(c42.375,76.3) U1.1@42.375,77.45
NetR1_2: R1.2 U2.5 | length 3.5
  Top Layer w0.55: U2.5 R1.2 R1.2@39.3,59.925
NetR2_2: R2.2 U1.5 | length 2.6
  Top Layer w0.55: U1.5@41.655,82.6 R2.2
NetR3_2: R3.2 U3.5 | length 3.3
  Top Layer w0.55: R3.2 108.015,66.45 U3.5
NetU1_6: U1.6 U3.1 | length 102.4
  Top Layer w1.1: U1.6 34.105,82.57 cw(c34.105,83.925) 32.75,83.925 32.75,85.825 cw(c34.3,85.825) 34.3,87.375 49.55,87.375 ccw(c49.55,89.25) 51.425,89.25 cw(c53.936,89.25) 53.936,91.761 101.463,91.761 cw(c100.635,89.36) 103.175,89.36 103.175,74.08 ccw(c105.715,74.08) 105.715,71.54 U3.1
NetU1_10: U1.10 U2.1 | length 39
  Top Layer w1.1: 34.175,77.49 33.065,77.49 ccw(c33.065,77.45) 33.025,77.45 ccw(c33.025,75.875) 31.45,75.875 31.45,65.465 ccw(c33.99,65.465) 33.99,62.925 40.335,62.925 cw(c40.335,60.385) 42.875,60.385 42.875,57.3 cw(c40.435,57.3) 40.435,54.86 U2.1@36.71,54.86

## Polygon pours and split planes (outlines as drawn)
GND on Top Layer "Top Layer-GND" (solid, pour order 0): 20,15 127,15 126.818,120.818 20,120.818 20,82
GND on Bottom Layer "Bottom layer-GND" (solid, pour order 2): 20,15 125.818,15 125.818,99 125.818,121.818 31,121.818 20,122 20,108.648

## Other copper
Top Layer:
  pour cut-out: 119.65,42.363 122.775,42.375 122.775,43.95 119.675,43.95 119.65,43.95
  pour cut-out: 98.975,110.007 98.975,106.882 100.563,106.883 100.563,109.983 100.563,110.008
  pour cut-out: 26.425,94 29.55,94 29.55,95.6 26.45,95.6 26.425,95.6
  pour cut-out: 47.463,32.525 47.463,29.4 49.037,29.4 49.037,32.5 49.037,32.525

## Silkscreen, mask and mechanical layers (free items; w line width, h text height)
Top Overlay:
  drawing of 10 lines, arcs and shapes, not listed
  text "Uniaerial" at 82.025,91.55 h5
board:
  drawing of 246 lines, arcs and shapes, not listed